# Altium PCB 大转盘2.PcbDoc
Units mil, origin at the board's own origin, x right, y up, seen from the top; angles counter-clockwise.
Board outline 6000 x 4000 mil, 2 copper layers (Top Layer, Bottom Layer); 21 components, 17 nets, 65 pads, 0 vias.
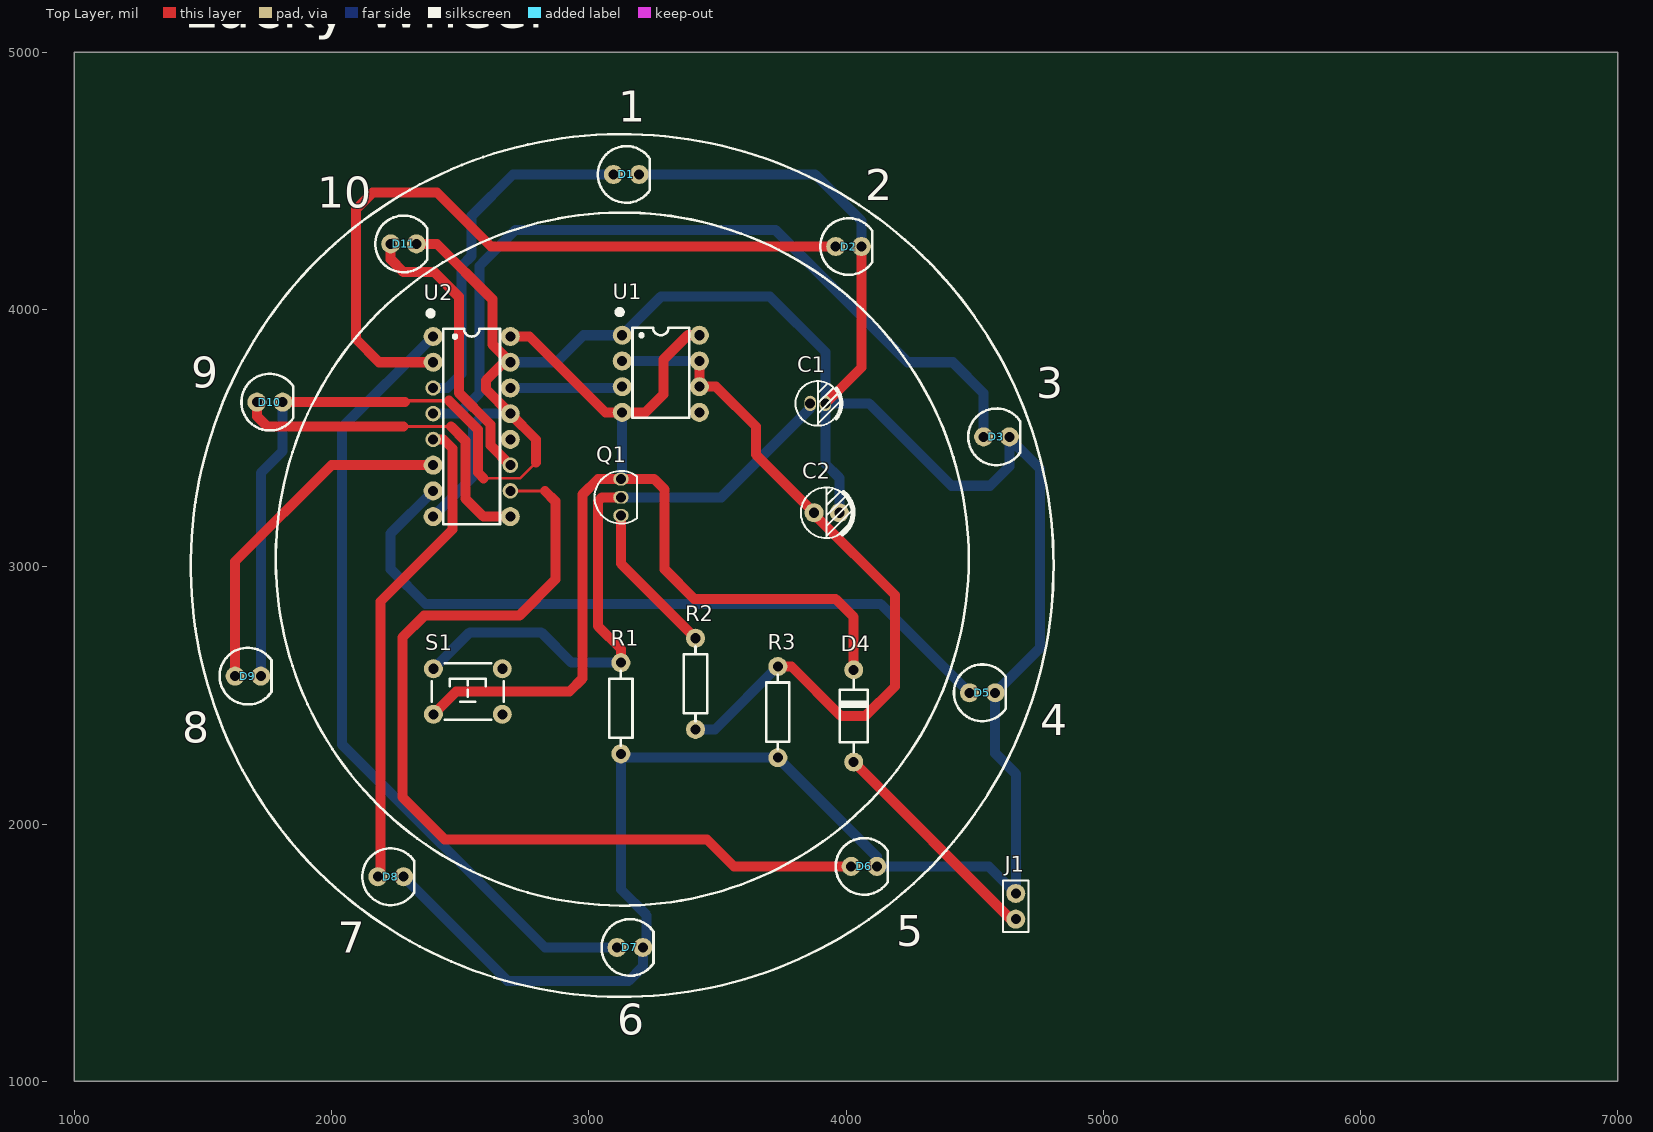
[diagram p0: Top Layer view]
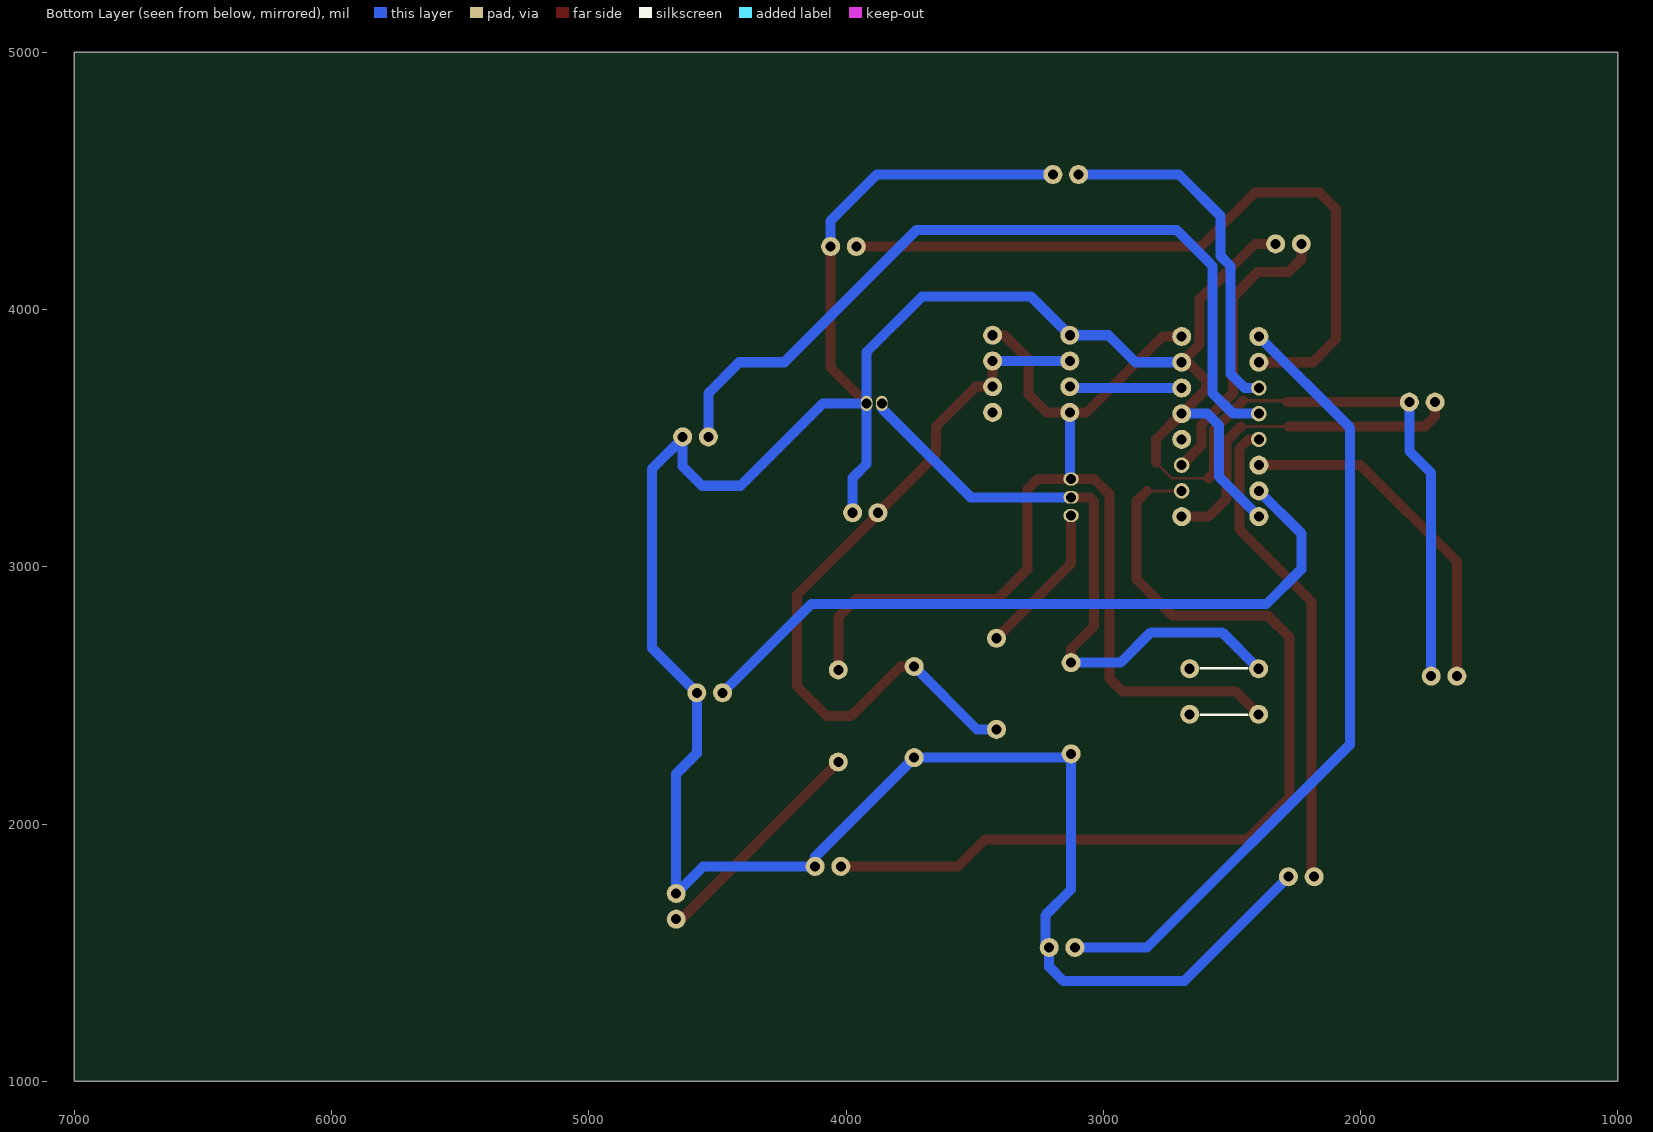
[diagram p1: Bottom Layer view, seen from below]

## Layer stack, top to bottom
Top Solder: solder mask 0.4, Solder Resist, Dk 3.5
Top Layer: signal copper 1.4
Dielectric 1: dielectric 12.6, FR-4, Dk 4.8
Bottom Layer: signal copper 1.4
Bottom Solder: solder mask 0.4, Solder Resist, Dk 3.5

## Board outline
1000,1000 7000,1000 7000,5000 1000,5000

## Design rules (kind name [scope] priority, off if disabled: settings)
Clearance Clearance_1 [All] p1: gap=10 ignorepadtopadclearanceinfootprint=FALSE except(0: Arc-Hole Track-Hole SMDPad-Hole THPad-Hole Via-Hole Fill-Hole Poly-Hole Region-Hole Text-Hole)
Clearance [All] p2: gap=10 ignorepadtopadclearanceinfootprint=FALSE except(0: Arc-Hole Track-Hole SMDPad-Hole THPad-Hole Via-Hole Fill-Hole Poly-Hole Region-Hole Text-Hole)
DiffPairsRouting [All] p1: maxlimit=10 minlimit=5 mostfreqgap=10 toplayer_minwidth=15 toplayer_maxwidth=15 toplayer_prefwidth=15 bottomlayer_minwidth=15 bottomlayer_maxwidth=15 bottomlayer_prefwidth=15 maxuncoupledlength=500
MinimumSolderMaskSliver [All] p1: minsoldermaskwidth=5
PolygonConnect [All] p1: connectstyle=Relief reliefconductorwidth=10 reliefentries=4 polygonreliefangle="90 Angle" airgapwidth=10
RoomDefinition 大转盘 [InComponentClass('大转盘')] p1: confinementstyle=ConfineIn formatcopy=TRUE outline 1315,1150 4935,1150 4935,5460 1315,5460
RoutingVias [All] p1: holewidth=28 width=50 viastyle="Through Hole" minholewidth=28 minwidth=0 maxholewidth=80 maxwidth=90
SilkToSolderMaskClearance [IsPad] p1: minsilkscreentomaskgap=0 clearancetoexposedcopper=TRUE
SolderMaskExpansion [All] p1: expansion=4
Width [All] p1: maxlimit=45 minlimit=10 preferedwidth=12
27 further rules are at their usual default settings.

## Components (designator, comment, footprint, x,y, rotation, side; value= is the part's Value field where it differs from the comment)
C1 "CAPACITOR POL" "CAP 1.5*4*8 - BK" 3890.47,3635 r0 top
C2 "CAPACITOR POL" "CAP 2.5*5*11 - BK" 3925,3210 r0 top
D1 "LED" "LED 5MM-R" 3145.79,4525 r0 top
D2 "LED" "LED 5MM-R" 4010,4245 r0 top
D3 "LED" "LED 5MM-R" 4585,3505 r0 top
D4 "1N4007" DO-41 4030,2420 r90 top
D5 "LED" "LED 5MM-R" 4530,2510 r0 top
D6 "LED" "LED 5MM-R" 4070,1835 r0 top
D7 "LED" "LED 5MM-R" 3160,1520 r0 top
D8 "LED" "LED 5MM-R" 2230,1795 r0 top
D9 "LED" "LED 5MM-R" 1675,2575 r0 top
D10 "LED" "LED 5MM-R" 1760,3640 r0 top
D11 "LED" "LED 5MM-R" 2280,4255 r0 top
J1 "CON2" HDR-1X2_M 4660,1630 r90 top
Q1 "9014" TO92A 3125,3270 r0 top
R1 "RES" "RS 1/4W" 3125,2450 r90 top
R2 "RES" "RS 1/4W" 3415,2545 r90 top
R3 "RES" "RS 1/4W" 3735,2435 r90 top
S1 "SW-PB" "TSW DIP-6*6*5" 2530,2515 r0 top
U1 "NE555" DIP8-300_MH 3280,3750 r0 top
U2 "CD4017" DIP16-300_MH 2545,3545 r0 top

## Footprints (in the part's own frame and the unit in brackets; to place one, negate y for a bottom-side part, rotate by r counter-clockwise, add the part's x,y. Pads: shape width x height; smd on the part's side, far side on the other; paste and mask are expansions set on the pad)
"CAP 1.5*4*8 - BK" [mil] "脚距1.5mm直径4mm高度8mm"
  oval 45x60 hole 39: 1(-29.53,0) 2(29.53,0)
  silkscreen extent -87,-86 95,86, body extent -79,-79 80,79, height 317
"CAP 2.5*5*11 - BK" [mil] "脚距2.5mm直径5mm高度11mm"
  round 74 hole 39: 1(-49.21,0) 2(49.21,0)
  silkscreen extent -100,-98 102,98, body extent -98,-98 99,98, height 435
DIP8-300_MH [mil] "带底座 9.4*7.6*3.8(长宽高）"
  round 74 hole 39: 1(-150,150) 2(-150,50) 3(-150,-50) 4(-150,-150) 5(150,-150) 6(150,-50) 7(150,50) 8(150,150)
  silkscreen extent -170,-170 110,250, body extent -197,-204 197,204, height 303
DIP16-300_MH [mil] "带底座 19.3*7.6*3.8(长宽高）"
  round 74 hole 39: 1(-150,350) 2(-150,250) 6(-150,-150) 7(-150,-250) 8(-150,-350) 9(150,-350) 12(150,-50) 13(150,50) 14(150,150) 15(150,250) 16(150,350)
  round 60 hole 39: 3(-150,150) 4(-150,50) 5(-150,-50) 10(150,-250) 11(150,-150)
  silkscreen extent -170,-380 110,450, body extent -196,-404 197,404, height 295
DO-41 [mil] "2.6*9.1mm(直径，脚距）"
  round 74 hole 39: 1(-179.13,0) 2(179.13,0)
  silkscreen extent -140,-55 140,55, body extent -194,-51 196,52, height 104
HDR-1X2_M [mil] "排母，2脚"
  round 74 hole 39: 1(0,0) 2(100,0)
  silkscreen extent -50,-50 150,50, body extent -50,-50 150,50, height 335
"LED 5MM-R" [mil] "红色5mm直插LED"
  round 74 hole 39: 1(-50,0) 2(50,0)
  silkscreen extent -110,-110 92,110, body extent -112,-112 97,112, height 344
"RS 1/4W" [mil] "直插色环电阻，脚距9mm，直径2.3mm"
  round 74 hole 39: 1(-177.17,0) 2(177.17,0)
  silkscreen extent -145,-45 145,45, body extent -186,-46 186,46, height 91
TO92A [mil] "92晶体管"
  oval 60x50 hole 39: 1(0,-70.87) 2(0,0) 3(0,70.87)
  silkscreen extent -102,-102 63,102, body extent -91,-91 51,91, height 299
"TSW DIP-6*6*5" [mil] "6*6*5mm"
  round 74 hole 39: 1(-133.86,88.58) 2(-133.86,-88.58) 3(133.86,-88.58) 4(133.86,88.58)
  silkscreen extent -140,-110 140,110, body extent -162,-118 162,118, height 195

## Part data
C1 C2: "Capacitor"
  C1: =47UF
  C2: =1UF
D1 D2 D3 D5 D6 D7 D8 D9 D10 D11: "LED 发光二极管"
D4: library part DIODE
J1: "Connector"
Q1: "NPN Transistor"
U1: library part 555, "Timer"
U2: library part 4017
R1 R3: =470K
R2: =10K

## Nets (pads, with @x,y where several pads share a name; then routed paths per layer and width w, separated by ;. In a path a pad name is that pad's centre, name@x,y a point inside that pad or via, vN(x,y) a via of type N, cw(c..) or ccw(c..) an arc to the next point about the centre after c; other vN are vias at no path point)
GND: C1.2 C2.2 D1.2 D2.2 D3.2 D5.2 D6.2 D7.2 D8.2 D9.2 D10.2 D11.2 J1.2 R1.1 R3.1 U1.1 U2.8 U2.13 U2.15 | length 14564.4
  Top Layer w10: 2591.54,3343.46 2733.46,3343.46 2795,3405
  Top Layer w12: 2295,3643.46 2297.07,3645.54 2456.39,3645.54
  Top Layer w39: D10.2@1810,3643.46 D10.2 2285,3640 ; D11.2 2410,4255 2625,4040 2625,3865 U2.15 2670,3795 2600,3725 2600,3690 U2.13 2795,3495 2795,3405 ; 2456.39,3645.54 2569,3532.93 2569,3366 2591.54,3343.46 ; C1.2 4060,3775 D2.2
  Bottom Layer w39: D9.2 1725,3365 1810,3450 D10.2 ; D8.2 2685,1390 3155,1390 3210,1445 D7.2 3225,1535 3225,1645 3125,1745 R1.1 3140,2257.83 R3.1 4120,1872.83 D6.2 4555,1835 J1.2 4660,2195 4580,2275 D5.2 4755,2685 4755,3380 D3.2@4635,3500 ; U2.8 2550,3350 2550,3550 2595,3595 U2.13 ; U2.15 2875,3795 2980,3900 U1.1 3280,4050 3705,4050 3920,3835 C1.2 ; D1.2 3880,4525 4060,4345 D2.2 ; C2.2 3974.21,3345.79 3920,3400 C1.2 ; D3.2 D3.2@4635,3500 ; C1.2 4090,3635 4410,3315 4560,3315 4635,3390 D3.2@4635,3500
NetC1_1: C1.1 Q1.2 R1.2 S1.1 | length 2494.1
  Top Layer w39: R1.2 3125,2680 3035.87,2769.13 3035.87,3254.13 3051.73,3270 Q1.2
  Bottom Layer w39: S1.1 2537.56,2745 2815,2745 2932.83,2627.17 R1.2 ; Q1.2 3515,3270 3860.94,3615.94 C1.1
NetC2_1: C2.1 R2.1 R3.2 U1.2 U1.6 U1.7 | length 2921.3
  Top Layer w39: U1.7 U1.6 3495,3700 3650,3545 3650,3435.79 C2.1 3875.79,3204.21 4190,2890 4190,2535 4075,2420 3980,2420 3787.83,2612.17 R3.2
  Bottom Layer w39: U1.2 U1.7 ; R2.1 3490.67,2367.83 R3.2
NetD1_1: D1.1 U2.3 | length 1381.4
  Bottom Layer w39: U2.3 2450,3695 2505,3750 2505,4168.75 2545,4208.75 2545,4365 2705,4525 D1.1
NetD2_1: D2.1 U2.2 | length 2821.2
  Top Layer w39: U2.2 2185,3795 2095,3885 2095,4390 2160,4455 2410,4455 2620,4245 D2.1
NetD3_1: D3.1 U2.4 | length 3159.2
  Bottom Layer w39: U2.4 2495,3595 2575,3675 2575,4169.45 2594,4188.45 2594,4189 2715,4310 3725,4310 4240,3795 4415,3795 4535,3675 D3.1
NetD4_1: D4.1 J1.1 | length 883
  Top Layer w10: J1.1@4640.87,1630 J1.1
  Top Layer w39: D4.1 J1.1@4640.87,1630
NetD5_1: D5.1 U2.7 | length 2822.2
  Bottom Layer w39: U2.7 2230,3130 2230,2990 2365,2855 4135,2855 D5.1
NetD6_1: D6.1 U2.10 | length 3661.6
  Top Layer w12: U2.10 2830,3295
  Top Layer w39: 2830,3295 2870,3255 2870,2950 2730,2810 2360,2810 2275,2725 2275,2105 2440,1940 3460,1940 3565,1835 D6.1
NetD7_1: D7.1 U2.1 | length 3129.3
  Bottom Layer w39: U2.1 2040,3540 2040,2310 2830,1520 D7.1
NetD8_1: D8.1 U2.5 | length 1874.6
  Top Layer w39: D8.1 2190,1805 2190,2865 2470,3145 2470,3460 2435,3495 U2.5
NetD9_1: D9.1 U2.6 | length 1370.3
  Top Layer w39: D9.1 1625,3020 2000,3395 U2.6
NetD10_1: D10.1 U2.9 | length 1333.3
  Top Layer w12: 2280,3545 2465,3545
  Top Layer w39: D10.1 1710,3585 1750,3545 2280,3545 ; 2465,3545 2520,3490 2520,3265 2590,3195 U2.9
NetD11_1: D11.1 U2.11 | length 1122.9
  Top Layer w39: D11.1 2230,4195 2280,4145 2400,4145 2495,4050 2495,3676.23 2618,3553.23 2618,3472 U2.11
NetQ1_1: Q1.1 R2.2 | length 597.1
  Top Layer w39: Q1.1 3125,3012.17 R2.2
NetU1_3: U1.3 U2.14 | length 437.1
  Bottom Layer w39: U2.14 3125,3695 U1.3
VCC: D4.2 Q1.3 S1.2 U1.4 U1.8 U2.16 | length 4362.6
  Top Layer w39: S1.2 2484.72,2515 2925,2515 2975,2565 2975,3280 3035.87,3340.87 Q1.3 3254.13,3340.87 3295,3300 3295,2990 3410,2875 3960,2875 4030,2805 D4.2 ; U2.16 2770,3895 3065,3600 U1.4 3220,3600 3290,3670 3290,3805 3385,3900 U1.8
  Bottom Layer w39: Q1.3 3130,3345.87 U1.4
pads on no net: S1.3 S1.4 U1.5 U2.12

## Silkscreen, mask and mechanical layers (free items; w line width, h text height)
Top Overlay:
  circle w10: c3130,3030 r1347.08
  circle w10: c3130,3005 r1677.06
  text "Lucky Wheel" at 1425,5095 h160
  text "1" at 3115,4730 h120
  text "2" at 4075,4425 h120
  text "10" at 1945,4395 h120
  text "9" at 1455,3695 h120
  text "3" at 4740,3655 h120
  text "4" at 4755,2345 h120
  text "8" at 1420,2315 h120
  text "5" at 4195,1525 h120
  text "7" at 2025,1500 h120
  text "6" at 3110,1180 h120